# Altium PCB LFFF.PcbDoc
Units mil, origin at the board's own origin, x right, y up, seen from the top; angles counter-clockwise.
Board outline 6000 x 4000 mil, 2 copper layers (Top Layer, Bottom Layer); 29 components, 17 nets, 165 pads, 0 vias.
Unrouted connection lines stored in the file: 64.
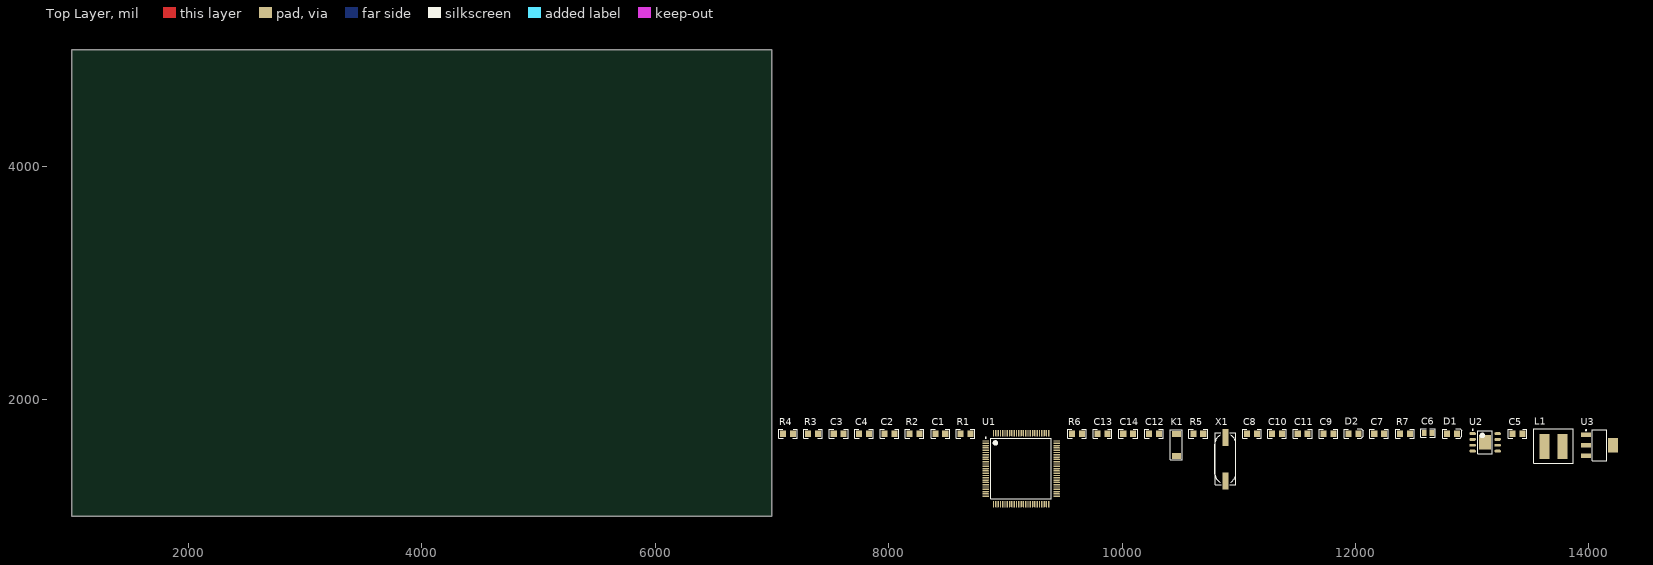
[diagram p0: Top Layer view]
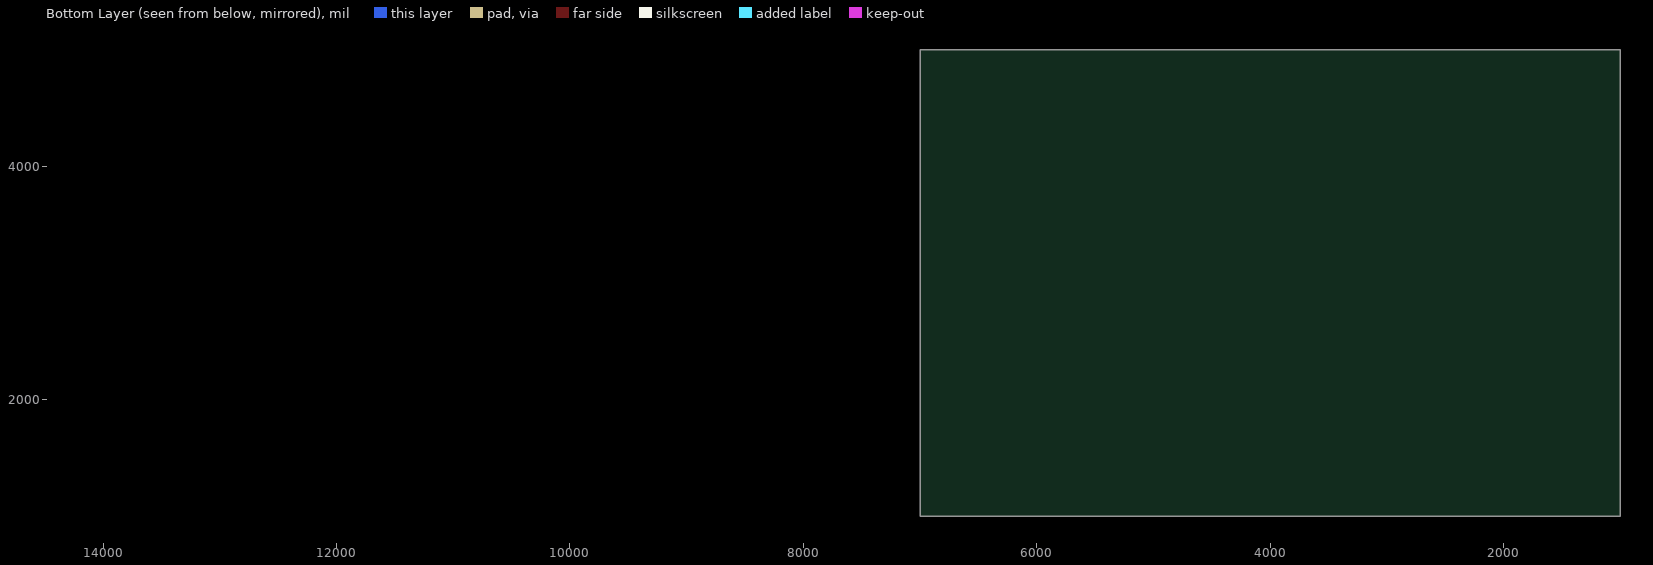
[diagram p1: Bottom Layer view, seen from below]

## Layer stack, top to bottom
Top Solder: solder mask 0.4, Solder Resist, Dk 3.5
Top Layer: signal copper 1.4
Dielectric 1: dielectric 12.6, FR-4, Dk 4.8
Bottom Layer: signal copper 1.4
Bottom Solder: solder mask 0.4, Solder Resist, Dk 3.5

## Board outline
1000,1000 7000,1000 7000,5000 1000,5000

## Design rules (kind name [scope] priority, off if disabled: settings)
Clearance [All] p1: gap=10 ignorepadtopadclearanceinfootprint=FALSE except(0: Arc-Hole Track-Hole SMDPad-Hole THPad-Hole Via-Hole Fill-Hole Poly-Hole Region-Hole Text-Hole)
PolygonConnect [All] p1: connectstyle=Relief reliefconductorwidth=10 reliefentries=4 polygonreliefangle="90 Angle" airgapwidth=10
RoomDefinition LFIF [InComponentClass('LFIF')] p1: confinementstyle=ConfineIn formatcopy=TRUE lockcomponents=FALSE outline 7045,1060 14265,1060 14265,1860 7045,1860
RoutingVias [All] p1: holewidth=28 width=50 viastyle="Through Hole" minholewidth=28 minwidth=50 maxholewidth=28 maxwidth=50
SolderMaskExpansion [All] p1: expansion=4
Width [All] p1: maxlimit=10 minlimit=10 preferedwidth=10
30 further rules are at their usual default settings.

## Components (designator, comment, footprint, x,y, rotation, side; value= is the part's Value field where it differs from the comment)
C1 "106" RC0805 8400,1710 r0 top
C2 "106" RC0805 7965,1710 r0 top
C3 "104" RC0805 7530,1710 r0 top
C4 "104" RC0805 7745,1710 r0 top
C5 "104" RC0805 13345,1710 r0 top
C6 "106" RC0603 12590,1715 r0 top
C7 "104" RC0805 12160,1710 r0 top
C8 "106" RC0805 11070,1710 r0 top
C9 "106" RC0805 11725,1710 r0 top
C10 "104" RC0805 11285,1710 r0 top
C11 "104" RC0805 11505,1710 r0 top
C12 "104" RC0805 10230,1710 r0 top
C13 "104" RC0805 9790,1710 r0 top
C14 "104" RC0805 10010,1710 r0 top
D1 "LED" LED 12785,1710 r0 top
D2 "LED" LED 11940,1710 r0 top
K1 "SW-PB" SW-PB 10465,1520 r90 top
L1 "15μH" CD45 13620,1600 r0 top
R1 "10K" RC0805 8615,1710 r0 top
R2 "10K" RC0805 8180,1710 r0 top
R3 "10K" RC0805 7310,1710 r0 top
R4 "10K" RC0805 7095,1710 r0 top
R5 "R" RC0805 10610,1710 r0 top
R6 "R" RC0805 9570,1710 r0 top
R7 "R" RC0805 12380,1710 r0 top
U1 "STM32F407VET6" STM32F407VET6 9135,1410 r0 top
U2 "TPS5430" TPS5430 13110,1635 r0 top
U3 "AMS1117" AMS1117 14090,1610 r0 top
X1 "XTAL" 49S-SMD 10885,1305 r90 top

## Footprints (in the part's own frame and the unit in brackets; to place one, negate y for a bottom-side part, rotate by r counter-clockwise, add the part's x,y. Pads: shape width x height; smd on the part's side, far side on the other; paste and mask are expansions set on the pad)
49S-SMD [mil]
  rect 146x51 smd: 1(0,0) 2(370,0)
  silkscreen extent -35,-90 413,90
AMS1117 [mm] "SOT223, 4-Leads, Body 6.51x7.00mm (avg), Pitch 2.29mm, IPC Medium Density"
  rect 2.15x0.9 smd: 1(-2.93,2.29) 2(-2.93,0) 3(-2.93,-2.29)
  rect 2.15x3.25 smd: 4(2.93,0)
  silkscreen extent -3.05,-3.35 1.55,3.41, body extent -1.86,-3.35 1.86,3.35, height 1.8
CD45 [mm]
  rect 2.15x5.5 smd: 1(0,0) 2(3.85,0)
  silkscreen extent -2.39,-3.68 6.24,3.81
LED [mil]
  rect 52x56 smd: 1(0,0) 2(84,0)
  silkscreen extent -38,-40 125,40
RC0603 [mil]
  rect 40x50 smd: 1(-0.41,-0.3) 2(64.59,-0.3)
  silkscreen extent -30,-35 95,35
RC0805 [mil]
  rect 52x56 smd: 1(0,0) 2(85,0)
  silkscreen extent -37,-39 122,39
STM32F407VET6 [mm] "TSQFP, 100-Leads, Body 14.00x14.00mm, Pitch 0.50mm, IPC Medium Density"
  oval 1.45x0.3 smd: 1(-7.725,6) 2(-7.725,5.5) 3(-7.725,5) 4(-7.725,4.5) 5(-7.725,4) 6(-7.725,3.5) 7(-7.725,3) 8(-7.725,2.5) 9(-7.725,2) 10(-7.725,1.5) 11(-7.725,1) 12(-7.725,0.5) 13(-7.725,0) 14(-7.725,-0.5) 15(-7.725,-1) 16(-7.725,-1.5) 17(-7.725,-2) 18(-7.725,-2.5) 19(-7.725,-3) 20(-7.725,-3.5) 21(-7.725,-4) 22(-7.725,-4.5) 23(-7.725,-5) 24(-7.725,-5.5) 25(-7.725,-6) 51(7.725,-6) 52(7.725,-5.5) 53(7.725,-5) 54(7.725,-4.5) 55(7.725,-4) 56(7.725,-3.5) 57(7.725,-3) 58(7.725,-2.5) 59(7.725,-2) 60(7.725,-1.5) 61(7.725,-1) 62(7.725,-0.5) 63(7.725,0) 64(7.725,0.5) 65(7.725,1) 66(7.725,1.5) 67(7.725,2) 68(7.725,2.5) 69(7.725,3) 70(7.725,3.5) 71(7.725,4) 72(7.725,4.5) 73(7.725,5) 74(7.725,5.5) 75(7.725,6)
  oval 0.3x1.45 smd: 26(-6,-7.725) 27(-5.5,-7.725) 28(-5,-7.725) 29(-4.5,-7.725) 30(-4,-7.725) 31(-3.5,-7.725) 32(-3,-7.725) 33(-2.5,-7.725) 34(-2,-7.725) 35(-1.5,-7.725) 36(-1,-7.725) 37(-0.5,-7.725) 38(0,-7.725) 39(0.5,-7.725) 40(1,-7.725) 41(1.5,-7.725) 42(2,-7.725) 43(2.5,-7.725) 44(3,-7.725) 45(3.5,-7.725) 46(4,-7.725) 47(4.5,-7.725) 48(5,-7.725) 49(5.5,-7.725) 50(6,-7.725) 76(6,7.725) 77(5.5,7.725) 78(5,7.725) 79(4.5,7.725) 80(4,7.725) 81(3.5,7.725) 82(3,7.725) 83(2.5,7.725) 84(2,7.725) 85(1.5,7.725) 86(1,7.725) 87(0.5,7.725) 88(0,7.725) 89(-0.5,7.725) 90(-1,7.725) 91(-1.5,7.725) 92(-2,7.725) 93(-2.5,7.725) 94(-3,7.725) 95(-3.5,7.725) 96(-4,7.725) 97(-4.5,7.725) 98(-5,7.725) 99(-5.5,7.725) 100(-6,7.725)
  silkscreen extent -7.85,-6.6 6.6,6.82, body extent -7,-7 7,7, height 1.6
SW-PB [mm]
  rect 1.3x2 smd paste+0 mask+0.2: 1(0,0) 2(4.7,0)
  silkscreen extent -0.89,-1.3 5.72,1.3
TPS5430 [mm] "SOIC, 8-Leads, Body 4.90x3.90mm, Pitch 1.27mm, IPC Medium Density"
  oval 1.45x0.6 smd: 1(-2.725,1.905) 2(-2.725,0.635) 3(-2.725,-0.635) 4(-2.725,-1.905) 5(2.725,-1.905) 6(2.725,-0.635) 7(2.725,0.635) 8(2.725,1.905)
  rect 2.6x3.1 smd: 9(0,0)
  silkscreen extent -2.85,-2.5 1.6,2.88, body extent -2,-2.5 2,2.5, height 1.7

## Part data
C1 C2 C3 C4 C5 C10 C11 C12 C13 C14: library part C
C6 C7 C8 C9: library part "C pol"
L1: library part L
R1 R2 R3 R4: library part R

## Nets (pads, with @x,y where several pads share a name; then routed paths per layer and width w, separated by ;. In a path a pad name is that pad's centre, name@x,y a point inside that pad or via, vN(x,y) a via of type N, cw(c..) or ccw(c..) an arc to the next point about the centre after c; other vN are vias at no path point)
3.3V: R2.2 U1.11 U1.28 U1.50 U1.75 U1.100
+5: C7.1 C8.1 C10.1 L1.2 R5.2 U3.3
GND: C1.1 C2.1 C6.2 C7.2 C8.2 C9.2 C10.2 C11.2 C12.1 C13.1 C14.1 D2.1 K1.2 R1.2 R4.2 R6.1 U1.10 U1.27 U1.74 U1.99 U2.6 U2.9 U3.1
NetC1_2: C1.2 U1.49
NetC2_2: C2.2 U1.73
NetC3_1: C3.1 C4.1 R4.1 U1.20
NetC3_2: C3.2 C4.2 R2.1 R3.2 U1.19 U1.22
NetC5_1: C5.1 U2.1
NetC5_2: C5.2 D2.2 L1.1 U2.8
NetD1_2: D1.2 U2.7
NetR1_1: R1.1 U1.94
NetR3_1: R3.1 U1.21
NetR5_1: R5.1 R6.2 U2.4
REST: C12.2 K1.1 R7.1 U1.14
VCC: C6.1 C9.1 C11.1 D1.1 R7.2 U3.2 U3.4
XTAL_IN: C13.2 U1.12 X1.1
XTAL_OUT: C14.2 U1.13 X1.2
pads on no net: U1.1 U1.2 U1.3 U1.4 U1.5 U1.6 U1.7 U1.8 U1.9 U1.15 U1.16 U1.17 U1.18 U1.23 U1.24 U1.25 U1.26 U1.29 U1.30 U1.31 U1.32 U1.33 U1.34 U1.35 U1.36 U1.37 U1.38 U1.39 U1.40 U1.41 U1.42 U1.43 U1.44 U1.45 U1.46 U1.47 U1.48 U1.51 U1.52 U1.53 U1.54 U1.55 U1.56 U1.57 U1.58 U1.59 U1.60 U1.61 U1.62 U1.63 U1.64 U1.65 U1.66 U1.67 U1.68 U1.69 U1.70 U1.71 U1.72 U1.76 U1.77 U1.78 U1.79 U1.80 U1.81 U1.82 U1.83 U1.84 U1.85 U1.86 U1.87 U1.88 U1.89 U1.90 U1.91 U1.92 U1.93 U1.95 U1.96 U1.97 U1.98 U2.2 U2.3 U2.5